# Altium PCB 00.Main.PcbDoc (part 4 of 5)
Units mm, origin at the board's own origin, x right, y up, seen from the top; angles counter-clockwise.
Board outline 300 x 165 mm, 2 copper layers (Top Layer, Bottom Layer); 76 components, 103 nets, 576 pads, 97 vias.
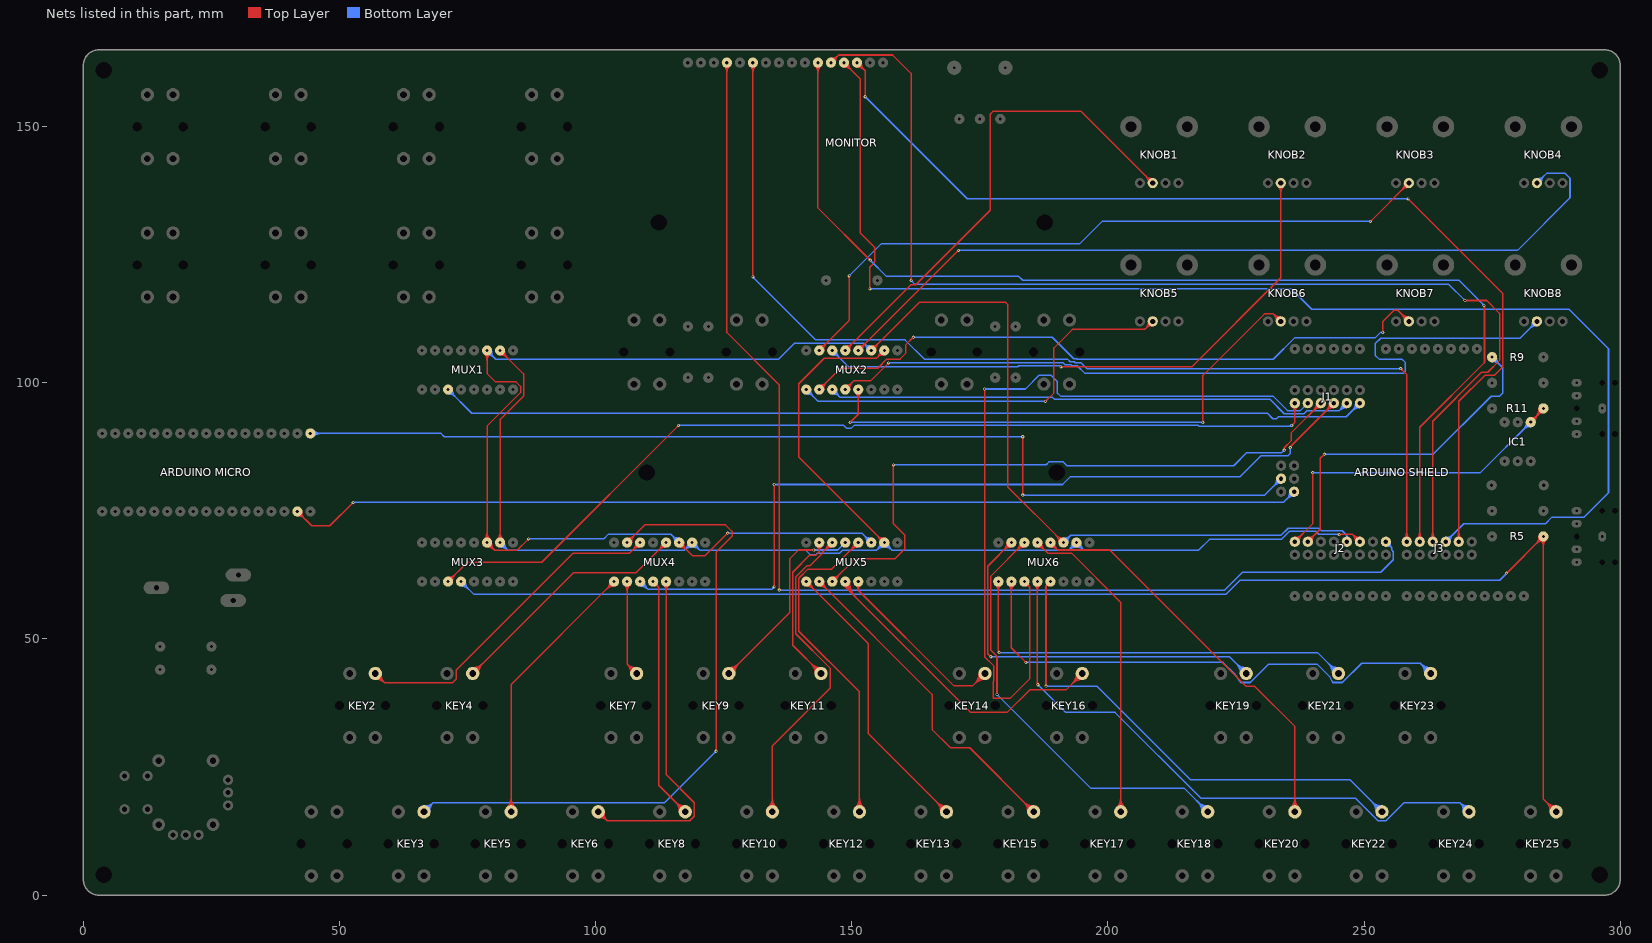
[diagram p4: the nets of this part, all layers, seen from the top]

## Via types
v1: diameter 0.6, hole 0.3, Top Layer to Bottom Layer, 97 vias

## Nets (pads, with @x,y where several pads share a name; then routed paths per layer and width w, separated by ;. In a path a pad name is that pad's centre, name@x,y a point inside that pad or via, vN(x,y) a via of type N, cw(c..) or ccw(c..) an arc to the next point about the centre after c; other vN are vias at no path point) (continued)
KEY2: KEY2.2 MUX4.14 | length 76.5
  Top Layer w0.3: KEY2.2@57,43.25 58.76,41.49 ; KEY2.2@57.068,42.403 cw(c57.193,40.841) 58.301,41.949 cw(c59.409,43.057) KEY2.2@57.847,43.182 ; KEY2.2@57.092,42.104 cw(c57.262,39.991) 58.76,41.49 ; KEY2.2@58.146,43.158 ccw(c60.259,42.988) 58.76,41.49 ; MUX4.14@107.84,68.81 cw(c105.788,68.81) 107.239,67.359 cw(c108.69,65.908) MUX4.14@108.69,67.96 ; MUX4.14@108.14,68.81 cw(c106.812,68.81) 107.751,67.871 cw(c108.69,66.932) MUX4.14@108.69,68.26 ; MUX4.14@108.69,68.81 106.592,66.712 95.566,66.712 72.757,43.903 72.757,42.15 72.096,41.49 58.76,41.49
KEY3: KEY3.2 MUX4.15 | length 141.4
  Top Layer w0.3: MUX4.15@106.15,68.81 109.589,72.249 125.36,72.249 126.63,70.979 126.63,70.065 123.506,66.94 v1(123.506,28.078) ; MUX4.15@106.15,69.36 ccw(c106.15,70.688) 107.089,69.749 ccw(c108.028,68.81) MUX4.15@106.7,68.81 ; MUX4.15@106.15,69.66 ccw(c106.15,71.712) 107.601,70.261 ccw(c109.052,68.81) MUX4.15@107,68.81 ; v1@123.4,28.184 ccw(c123.144,28.441) 123.506,28.441 ccw(c123.868,28.441) v1@123.612,28.184
  Bottom Layer w0.3: KEY3.2@66.5,16.25 68.27,18.02 ; KEY3.2@66.565,17.098 ccw(c66.685,18.681) 67.808,17.558 ccw(c68.931,16.435) KEY3.2@67.348,16.315 ; KEY3.2@66.587,17.397 ccw(c66.75,19.539) 68.27,18.02 ; KEY3.2@67.647,16.337 cw(c69.789,16.5) 68.27,18.02 ; v1@123.356,28.078 cw(c122.994,28.078) 123.25,27.822 cw(c123.506,27.566) v1@123.506,27.928 ; v1(123.506,28.078) 113.447,18.02 68.27,18.02
KEY4: KEY4.2 MUX4.12 | length 63.3
  Top Layer w0.3: KEY4.2@76,43.25 95.626,62.876 107.836,62.876 MUX4.12@113.77,68.81 ; KEY4.2@76,43.8 ccw(c76,45.128) 76.939,44.189 ccw(c77.878,43.25) KEY4.2@76.55,43.25 ; KEY4.2@76,44.1 ccw(c76,46.152) 77.451,44.701 ccw(c78.902,43.25) KEY4.2@76.85,43.25 ; KEY4.2@76,44.4 ccw(c76,47.176) 77.963,45.213 ccw(c79.926,43.25) KEY4.2@77.15,43.25 ; MUX4.12@112.92,68.81 cw(c110.868,68.81) 112.319,67.359 cw(c113.77,65.908) MUX4.12@113.77,67.96 ; MUX4.12@113.22,68.81 cw(c111.892,68.81) 112.831,67.871 cw(c113.77,66.932) MUX4.12@113.77,68.26
KEY5: KEY5.2 MUX4.1 | length 68.2
  Top Layer w0.3: KEY5.2@82.687,17.063 ccw(c80.724,19.026) 83.5,19.026 ccw(c86.276,19.026) KEY5.2@84.313,17.063 ; KEY5.2@82.899,16.851 ccw(c81.448,18.302) 83.5,18.302 ccw(c85.552,18.302) KEY5.2@84.101,16.851 ; KEY5.2@83.111,16.639 ccw(c82.172,17.578) 83.5,17.578 ccw(c84.828,17.578) KEY5.2@83.889,16.639 ; KEY5.2@83.5,16.25 83.5,41.08 MUX4.1@103.61,61.19 ; MUX4.1@102.76,61.19 cw(c100.708,61.19) 102.159,59.739 cw(c103.61,58.288) MUX4.1@103.61,60.34 ; MUX4.1@103.06,61.19 cw(c101.732,61.19) 102.671,60.251 cw(c103.61,59.312) MUX4.1@103.61,60.64
KEY6: KEY6.2 MUX4.5 | length 79.6
  Top Layer w0.3: KEY6.2@100.5,16.25 102.261,14.489 118.375,14.489 119.264,15.378 119.264,18.02 113.77,23.514 MUX4.5@113.77,61.19 ; KEY6.2@100.568,15.403 cw(c100.693,13.841) 101.801,14.949 cw(c102.909,16.057) KEY6.2@101.347,16.182 ; KEY6.2@100.592,15.104 cw(c100.761,12.99) 102.261,14.489 cw(c103.76,15.989) KEY6.2@101.646,16.158 ; MUX4.5@113.169,60.589 cw(c111.718,59.138) 113.77,59.138 cw(c115.822,59.138) MUX4.5@114.371,60.589 ; MUX4.5@113.381,60.801 cw(c112.442,59.862) 113.77,59.862 cw(c115.098,59.862) MUX4.5@114.159,60.801
KEY7: KEY7.2 MUX4.2 | length 30.9
  Top Layer w0.3: MUX4.2@105.549,60.589 cw(c104.098,59.138) 106.15,59.138 cw(c108.202,59.138) MUX4.2@106.751,60.589 ; MUX4.2@105.761,60.801 cw(c104.822,59.862) 106.15,59.862 cw(c107.478,59.862) MUX4.2@106.539,60.801 ; MUX4.2@106.15,61.19 106.15,45.1 ; KEY7.2@106.851,43.299 ccw(c104.453,43.402) 106.15,45.1 ; KEY7.2@107.151,43.286 ccw(c105.378,43.363) 106.633,44.617 ccw(c107.887,45.872) KEY7.2@107.964,44.099 ; KEY7.2@107.951,44.399 cw(c107.848,46.797) 106.15,45.1 ; KEY7.2@108,43.25 106.15,45.1
KEY8: KEY8.2 MUX4.4 | length 59.1
  Top Layer w0.3: MUX4.4@111.23,61.19 112.304,60.116 ; MUX4.4@111.428,60.363 cw(c111.645,59.456) 112.304,60.116 ; MUX4.4@112.057,60.992 ccw(c112.964,60.775) 112.304,60.116 ; KEY8.2@116.35,16.25 ccw(c113.574,16.25) 115.537,18.213 ccw(c117.5,20.176) KEY8.2@117.5,17.4 ; KEY8.2@116.65,16.25 ccw(c114.598,16.25) 116.049,17.701 ccw(c117.5,19.152) KEY8.2@117.5,17.1 ; KEY8.2@116.95,16.25 ccw(c115.622,16.25) 116.561,17.189 ccw(c117.5,18.128) KEY8.2@117.5,16.8 ; KEY8.2@117.5,16.25 112.304,21.446 112.304,60.116
KEY9: KEY9.2 MUX5.13 | length 50.3
  Top Layer w0.3: KEY9.2@126,43.25 137.86,55.11 137.86,65.597 139.623,67.36 v1(142.597,67.36) ; KEY9.2@126,43.8 ccw(c126,45.128) 126.939,44.189 ccw(c127.878,43.25) KEY9.2@126.55,43.25 ; KEY9.2@126,44.1 ccw(c126,46.152) 127.451,44.701 ccw(c128.902,43.25) KEY9.2@126.85,43.25 ; KEY9.2@126,44.4 ccw(c126,47.176) 127.963,45.213 ccw(c129.926,43.25) KEY9.2@127.15,43.25 ; v1@142.491,67.254 ccw(c142.235,66.998) 142.235,67.36 ccw(c142.235,67.722) v1@142.491,67.466
  Bottom Layer w0.3: v1(142.597,67.36) 147.28,67.36 MUX5.13@148.73,68.81 ; v1@142.703,67.254 cw(c142.959,66.998) 142.959,67.36 cw(c142.959,67.722) v1@142.703,67.466
KEY10: KEY10.2 MUX5.14 | length 78.3
  Top Layer w0.3: KEY10.2@133.687,17.063 ccw(c131.724,19.026) 134.5,19.026 ccw(c137.276,19.026) KEY10.2@135.313,17.063 ; KEY10.2@133.899,16.851 ccw(c132.448,18.302) 134.5,18.302 ccw(c136.552,18.302) KEY10.2@135.101,16.851 ; KEY10.2@134.111,16.639 ccw(c133.172,17.578) 134.5,17.578 ccw(c135.828,17.578) KEY10.2@134.889,16.639 ; KEY10.2@134.5,16.25 134.5,29.116 145.756,40.372 145.756,44.309 139.06,51.005 139.06,62.084 141.224,64.248 141.819,64.248 144.25,66.679 144.25,66.87 MUX5.14@146.19,68.81 ; MUX5.14@145.34,68.81 cw(c143.288,68.81) 144.739,67.359 cw(c146.19,65.908) MUX5.14@146.19,67.96 ; MUX5.14@145.64,68.81 cw(c144.312,68.81) 145.251,67.871 cw(c146.19,66.932) MUX5.14@146.19,68.26
KEY11: KEY11.2 MUX5.15 | length 44.7
  Top Layer w0.3: KEY11.2@142.85,43.25 ccw(c140.074,43.25) 142.037,45.213 ccw(c144,47.176) KEY11.2@144,44.4 ; MUX5.15@143.112,68.152 cw(c142.183,67.017) 143.65,67.017 ; KEY11.2@143.15,43.25 ccw(c141.098,43.25) 142.549,44.701 ccw(c144,46.152) KEY11.2@144,44.1 ; MUX5.15@143.302,68.384 cw(c142.701,67.65) 143.65,67.65 cw(c144.599,67.65) MUX5.15@143.998,68.384 ; KEY11.2@143.45,43.25 ccw(c142.122,43.25) 143.061,44.189 ccw(c144,45.128) KEY11.2@144,43.8 ; MUX5.15@143.65,68.81 143.65,67.017 ; KEY11.2@144,43.25 138.46,48.79 138.46,63.035 141.797,66.372 143.005,66.372 143.65,67.017 ; MUX5.15@144.188,68.152 ccw(c145.117,67.017) 143.65,67.017
KEY12: KEY12.2 MUX5.12 | length 80
  Top Layer w0.3: MUX5.12@150.42,68.81 cw(c148.368,68.81) 149.819,67.359 cw(c151.27,65.908) MUX5.12@151.27,67.96 ; KEY12.2@150.687,17.063 ccw(c148.724,19.026) 151.5,19.026 ccw(c154.276,19.026) KEY12.2@152.313,17.063 ; MUX5.12@150.72,68.81 cw(c149.392,68.81) 150.331,67.871 cw(c151.27,66.932) MUX5.12@151.27,68.26 ; KEY12.2@150.899,16.851 ccw(c149.448,18.302) 151.5,18.302 ccw(c153.552,18.302) KEY12.2@152.101,16.851 ; KEY12.2@151.111,16.639 ccw(c150.172,17.578) 151.5,17.578 ccw(c152.828,17.578) KEY12.2@151.889,16.639 ; MUX5.12@151.27,68.81 146.101,63.641 141.466,63.641 139.66,61.835 139.66,51.523 151.5,39.683 KEY12.2@151.5,16.25
KEY13: KEY13.2 MUX5.1 | length 71.3
  Top Layer w0.3: MUX5.1@141.11,60.34 cw(c141.11,58.288) 142.561,59.739 cw(c144.012,61.19) MUX5.1@141.96,61.19 ; MUX5.1@141.11,60.64 cw(c141.11,59.312) 142.049,60.251 cw(c142.988,61.19) MUX5.1@141.66,61.19 ; MUX5.1@141.11,61.19 153.249,49.051 153.249,31.501 KEY13.2@168.5,16.25 ; KEY13.2@167.35,16.25 ccw(c164.574,16.25) 166.537,18.213 ccw(c168.5,20.176) KEY13.2@168.5,17.4 ; KEY13.2@167.65,16.25 ccw(c165.598,16.25) 167.049,17.701 ccw(c168.5,19.152) KEY13.2@168.5,17.1 ; KEY13.2@167.95,16.25 ccw(c166.622,16.25) 167.561,17.189 ccw(c168.5,18.128) KEY13.2@168.5,16.8
KEY14: KEY14.2 MUX5.5 | length 48.7
  Top Layer w0.3: MUX5.5@150.762,60.508 cw(c150.008,59.496) 151.27,59.496 cw(c152.532,59.496) MUX5.5@151.778,60.508 ; MUX5.5@150.941,60.749 cw(c150.453,60.094) 151.27,60.094 cw(c152.087,60.094) MUX5.5@151.599,60.749 ; MUX5.5@151.27,61.19 151.27,59.496 169.937,40.829 173.579,40.829 KEY14.2@176,43.25 ; KEY14.2@174.85,43.25 cw(c172.074,43.25) 174.037,41.287 cw(c176,39.324) KEY14.2@176,42.1 ; KEY14.2@175.15,43.25 cw(c173.098,43.25) 174.549,41.799 cw(c176,40.348) KEY14.2@176,42.4 ; KEY14.2@175.45,43.25 cw(c174.122,43.25) 175.061,42.311 cw(c176,41.372) KEY14.2@176,42.7
KEY15: KEY15.2 MUX5.2 | length 79.4
  Top Layer w0.3: MUX5.2@143.65,60.34 cw(c143.65,58.288) 145.101,59.739 cw(c146.552,61.19) MUX5.2@144.5,61.19 ; MUX5.2@143.65,60.64 cw(c143.65,59.312) 144.589,60.251 cw(c145.528,61.19) MUX5.2@144.2,61.19 ; MUX5.2@143.65,61.19 165.67,39.17 165.67,32.346 169.277,28.739 173.011,28.739 KEY15.2@185.5,16.25 ; KEY15.2@184.35,16.25 ccw(c181.574,16.25) 183.537,18.213 ccw(c185.5,20.176) KEY15.2@185.5,17.4 ; KEY15.2@184.65,16.25 ccw(c182.598,16.25) 184.049,17.701 ccw(c185.5,19.152) KEY15.2@185.5,17.1 ; KEY15.2@184.95,16.25 ccw(c183.622,16.25) 184.561,17.189 ccw(c185.5,18.128) KEY15.2@185.5,16.8
KEY16: KEY16.2 MUX5.4 | length 83
  Top Layer w0.3: MUX5.4@148.38,61.19 ccw(c150.03,61.19) 148.863,60.023 ; MUX5.4@148.566,60.356 cw(c148.527,60.157) 148.73,60.157 ; MUX5.4@148.68,61.19 ccw(c151.054,61.19) 149.375,59.511 ; MUX5.4@148.73,61.19 148.73,60.157 ; MUX5.4@148.894,60.356 ccw(c148.933,60.157) 148.73,60.157 ; MUX5.4@148.98,61.19 ccw(c152.078,61.19) 149.887,58.999 ; MUX5.4@149.28,61.19 ccw(c153.103,61.19) 150.4,58.487 ; MUX5.4@149.58,61.19 ccw(c154.127,61.19) 150.912,57.975 ; KEY16.2@193.85,43.25 cw(c191.074,43.25) 193.037,41.287 cw(c195,39.324) KEY16.2@195,42.1 ; KEY16.2@194.15,43.25 cw(c192.098,43.25) 193.549,41.799 cw(c195,40.348) KEY16.2@195,42.4 ; KEY16.2@194.45,43.25 cw(c193.122,43.25) 194.061,42.311 cw(c195,41.372) KEY16.2@195,42.7 ; KEY16.2@195,43.25 191.804,40.054 184.736,40.054 180.329,35.648 173.239,35.648 148.73,60.157
KEY17: KEY17.2 MUX6.13 | length 77
  Top Layer w0.3: MUX6.13@186.23,67.96 cw(c186.23,65.908) 187.681,67.359 cw(c189.132,68.81) MUX6.13@187.08,68.81 ; MUX6.13@186.23,68.26 cw(c186.23,66.932) 187.169,67.871 cw(c188.108,68.81) MUX6.13@186.78,68.81 ; MUX6.13@186.23,68.81 188.28,66.76 192.876,66.76 202.5,57.136 KEY17.2@202.5,16.25 ; KEY17.2@201.687,17.063 ccw(c199.724,19.026) 202.5,19.026 ccw(c205.276,19.026) KEY17.2@203.313,17.063 ; KEY17.2@201.899,16.851 ccw(c200.448,18.302) 202.5,18.302 ccw(c204.552,18.302) KEY17.2@203.101,16.851 ; KEY17.2@202.111,16.639 ccw(c201.172,17.578) 202.5,17.578 ccw(c203.828,17.578) KEY17.2@202.889,16.639
KEY18: KEY18.2 MUX6.14 | length 99.6
  Top Layer w0.3: v1@178.244,39.259 ccw(c177.988,39.515) 178.35,39.515 ccw(c178.712,39.515) v1@178.456,39.259 ; v1(178.35,39.153) 178.35,46.615 177.16,47.805 177.16,62.28 MUX6.14@183.69,68.81 ; MUX6.14@182.84,68.81 cw(c180.788,68.81) 182.239,67.359 cw(c183.69,65.908) MUX6.14@183.69,67.96 ; MUX6.14@183.14,68.81 cw(c181.812,68.81) 182.751,67.871 cw(c183.69,66.932) MUX6.14@183.69,68.26
  Bottom Layer w0.3: v1@178.35,39.003 cw(c178.35,38.641) 178.606,38.897 cw(c178.862,39.153) v1@178.5,39.153 ; v1(178.35,39.153) 196.689,20.814 214.936,20.814 KEY18.2@219.5,16.25 ; KEY18.2@218.35,16.25 ccw(c215.574,16.25) 217.537,18.213 ccw(c219.5,20.176) KEY18.2@219.5,17.4 ; KEY18.2@218.65,16.25 ccw(c216.598,16.25) 218.049,17.701 ccw(c219.5,19.152) KEY18.2@219.5,17.1 ; KEY18.2@218.95,16.25 ccw(c217.622,16.25) 218.561,17.189 ccw(c219.5,18.128) KEY18.2@219.5,16.8
KEY19: KEY19.2 MUX6.15 | length 91.8
  Top Layer w0.3: v1@177.001,46.519 ccw(c176.638,46.519) 176.895,46.775 ccw(c177.151,47.031) v1@177.151,46.669 ; v1(177.151,46.519) 176.541,47.128 176.541,64.201 MUX6.15@181.15,68.81 ; MUX6.15@180.3,68.81 cw(c178.248,68.81) 179.699,67.359 cw(c181.15,65.908) MUX6.15@181.15,67.96 ; MUX6.15@180.6,68.81 cw(c179.272,68.81) 180.211,67.871 cw(c181.15,66.932) MUX6.15@181.15,68.26
  Bottom Layer w0.3: v1(177.151,46.519) 223.731,46.519 KEY19.2@227,43.25 ; v1@177.257,46.413 cw(c177.513,46.157) 177.513,46.519 cw(c177.513,46.881) v1@177.257,46.625 ; KEY19.2@225.85,43.25 ccw(c223.074,43.25) 225.037,45.213 ccw(c227,47.176) KEY19.2@227,44.4 ; KEY19.2@226.15,43.25 ccw(c224.098,43.25) 225.549,44.701 ccw(c227,46.152) KEY19.2@227,44.1 ; KEY19.2@226.45,43.25 ccw(c225.122,43.25) 226.061,44.189 ccw(c227,45.128) KEY19.2@227,43.8
KEY20: KEY20.2 MUX6.12 | length 94.2
  Top Layer w0.3: MUX6.12@188.77,67.96 cw(c188.771,65.912) 190.22,67.36 ; MUX6.12@188.77,68.26 cw(c188.771,66.935) 189.708,67.872 cw(c190.645,68.809) MUX6.12@189.32,68.81 ; MUX6.12@188.77,68.81 190.22,67.36 ; MUX6.12@189.62,68.81 ccw(c191.668,68.808) 190.22,67.36 ; KEY20.2@235.687,17.063 ccw(c233.724,19.026) 236.5,19.026 ccw(c239.276,19.026) KEY20.2@237.313,17.063 ; KEY20.2@235.899,16.851 ccw(c234.448,18.302) 236.5,18.302 ccw(c238.552,18.302) KEY20.2@237.101,16.851 ; KEY20.2@236.111,16.639 ccw(c235.172,17.578) 236.5,17.578 ccw(c237.828,17.578) KEY20.2@236.889,16.639 ; KEY20.2@236.5,16.25 236.5,32.915 228.687,40.728 226.997,40.728 200.365,67.36 190.22,67.36
KEY21: KEY21.2 MUX6.1 | length 98.1
  Top Layer w0.3: MUX6.1@178.009,60.589 cw(c176.558,59.138) 178.61,59.138 cw(c180.662,59.138) MUX6.1@179.211,60.589 ; MUX6.1@178.221,60.801 cw(c177.282,59.862) 178.61,59.862 cw(c179.938,59.862) MUX6.1@178.999,60.801 ; 178.61,48.034 ccw(c179.453,48.034) v1@178.857,47.438 ; MUX6.1@178.61,61.19 178.61,47.472 v1(178.751,47.332)
  Bottom Layer w0.3: v1(178.751,47.332) 240.918,47.332 KEY21.2@245,43.25 ; v1@178.857,47.226 cw(c179.113,46.969) 179.113,47.332 cw(c179.113,47.694) v1@178.857,47.438 ; KEY21.2@243.85,43.25 ccw(c241.074,43.25) 243.037,45.213 ccw(c245,47.176) KEY21.2@245,44.4 ; KEY21.2@244.15,43.25 ccw(c242.098,43.25) 243.549,44.701 ccw(c245,46.152) KEY21.2@245,44.1 ; KEY21.2@244.45,43.25 ccw(c243.122,43.25) 244.061,44.189 ccw(c245,45.128) KEY21.2@245,43.8
KEY22: KEY22.2 MUX6.5 | length 108.3
  Top Layer w0.3: v1@187.814,40.91 ccw(c187.558,41.166) 187.92,41.166 ccw(c188.282,41.166) v1@188.026,40.91 ; v1(187.92,40.804) 187.92,60.34 ; MUX6.5@188.003,60.823 cw(c187.62,60.64) 187.92,60.34 ; MUX6.5@188.403,60.423 ccw(c188.22,60.04) 187.92,60.34 ; MUX6.5@188.77,61.19 187.92,60.34
  Bottom Layer w0.3: v1(187.92,40.804) 197.826,40.804 216.114,22.516 247.234,22.516 KEY22.2@253.5,16.25 ; v1@188.026,40.698 cw(c188.282,40.442) 188.282,40.804 cw(c188.282,41.166) v1@188.026,40.91 ; KEY22.2@252.35,16.25 ccw(c249.574,16.25) 251.537,18.213 ccw(c253.5,20.176) KEY22.2@253.5,17.4 ; KEY22.2@252.65,16.25 ccw(c250.598,16.25) 252.049,17.701 ccw(c253.5,19.152) KEY22.2@253.5,17.1 ; KEY22.2@252.95,16.25 ccw(c251.622,16.25) 252.561,17.189 ccw(c253.5,18.128) KEY22.2@253.5,16.8
KEY23: KEY23.2 MUX6.2 | length 119.4
  Top Layer w0.3: MUX6.2@180.549,60.589 cw(c179.098,59.138) 181.15,59.138 cw(c183.202,59.138) MUX6.2@181.751,60.589 ; MUX6.2@180.761,60.801 cw(c179.822,59.862) 181.15,59.862 cw(c182.478,59.862) MUX6.2@181.539,60.801 ; MUX6.2@181.15,61.19 181.15,48.285 v1(184.009,45.427) ; v1@183.859,45.427 ccw(c183.496,45.427) 183.753,45.683 ccw(c184.009,45.939) v1@184.009,45.577
  Bottom Layer w0.3: v1(184.009,45.427) 222.49,45.427 224.676,43.24 225.908,41.5 227.783,41.5 231.303,45.02 240.905,45.02 243.267,42.658 243.917,41.5 245.766,41.5 249.541,45.274 260.976,45.274 KEY23.2@263,43.25 ; v1@184.115,45.321 cw(c184.371,45.064) 184.371,45.427 cw(c184.371,45.789) v1@184.115,45.533 ; KEY23.2@261.85,43.25 ccw(c259.074,43.25) 261.037,45.213 ccw(c263,47.176) KEY23.2@263,44.4 ; KEY23.2@262.15,43.25 ccw(c260.098,43.25) 261.549,44.701 ccw(c263,46.152) KEY23.2@263,44.1 ; KEY23.2@262.45,43.25 ccw(c261.122,43.25) 262.061,44.189 ccw(c263,45.128) KEY23.2@263,43.8
KEY24: KEY24.2 MUX6.4 | length 130.4
  Top Layer w0.3: MUX6.4@185.629,60.589 cw(c184.178,59.138) 186.23,59.138 cw(c188.282,59.138) MUX6.4@186.831,60.589 ; MUX6.4@185.841,60.801 cw(c184.902,59.862) 186.23,59.862 cw(c187.558,59.862) MUX6.4@186.619,60.801 ; 186.23,41.699 ccw(c186.986,41.699) v1@186.451,41.164 ; MUX6.4@186.23,61.19 186.23,41.173 v1(186.345,41.058)
  Bottom Layer w0.3: v1@186.345,40.908 cw(c186.345,40.546) 186.601,40.802 cw(c186.858,41.058) v1@186.495,41.058 ; v1(186.345,41.058) 191.756,35.648 201.408,35.648 218.121,18.934 248.296,18.934 252.73,14.5 254.301,14.5 257.821,18.02 268.73,18.02 ; KEY24.2@269.353,16.337 ccw(c267.211,16.5) 268.73,18.02 ; KEY24.2@269.652,16.315 ccw(c268.069,16.435) 269.192,17.558 ccw(c270.315,18.681) KEY24.2@270.435,17.098 ; KEY24.2@270.413,17.397 cw(c270.25,19.539) 268.73,18.02 ; KEY24.2@270.5,16.25 268.73,18.02
KEY25: KEY25.2 MUX3.4 R5.2 | length 298.5
  Top Layer w0.3: v1(277.844,62.844) R5.2@285,70 285,18.75 KEY25.2@287.5,16.25 ; v1@277.844,62.994 ccw(c277.844,63.356) 278.1,63.1 ccw(c278.356,62.844) v1@277.994,62.844 ; 284.061,69.061 ccw(c283.122,70) R5.2@284.45,70 ; 284.061,69.061 cw(c285,68.122) R5.2@285,69.45 ; R5.2@284.15,70 cw(c282.098,70) 283.549,68.549 cw(c285,67.098) R5.2@285,69.15 ; R5.2@284.399,69.399 cw(c282.948,67.948) 285,67.948 cw(c287.052,67.948) R5.2@285.601,69.399 ; R5.2@284.611,69.611 cw(c283.672,68.672) 285,68.672 cw(c286.328,68.672) R5.2@285.389,69.611 ; KEY25.2@286.35,16.25 ccw(c283.574,16.25) 285.537,18.213 ccw(c287.5,20.176) KEY25.2@287.5,17.4 ; KEY25.2@286.65,16.25 ccw(c284.598,16.25) 286.049,17.701 ccw(c287.5,19.152) KEY25.2@287.5,17.1 ; KEY25.2@286.95,16.25 ccw(c285.622,16.25) 286.561,17.189 ccw(c287.5,18.128) KEY25.2@287.5,16.8
  Bottom Layer w0.3: MUX3.4@73.73,60.34 cw(c73.73,58.288) 75.181,59.739 cw(c76.632,61.19) MUX3.4@74.58,61.19 ; MUX3.4@73.73,60.64 cw(c73.73,59.312) 74.669,60.251 cw(c75.608,61.19) MUX3.4@74.28,61.19 ; MUX3.4@73.73,61.19 76.235,58.685 222.998,58.685 225.792,61.479 276.479,61.479 v1(277.844,62.844) ; v1@277.694,62.844 cw(c277.331,62.844) 277.588,62.588 cw(c277.844,62.331) v1@277.844,62.694
KNOB1: KNOB1.2 MUX2.13 | length 106.7
  Top Layer w0.3: MUX2.13@148.73,106.31 161.558,119.138 162.469,119.138 177.024,133.693 177.024,152.437 177.557,152.97 194.78,152.97 KNOB1.2@208.75,139 ; MUX2.13@148.73,106.86 ccw(c148.73,108.188) 149.669,107.249 ccw(c150.608,106.31) MUX2.13@149.28,106.31 ; MUX2.13@148.73,107.16 ccw(c148.73,109.212) 150.181,107.761 ccw(c151.632,106.31) MUX2.13@149.58,106.31 ; KNOB1.2@207.9,139 ccw(c205.848,139) 207.299,140.451 ccw(c208.75,141.902) KNOB1.2@208.75,139.85 ; KNOB1.2@208.2,139 ccw(c206.872,139) 207.811,139.939 ccw(c208.75,140.878) KNOB1.2@208.75,139.55
KNOB2: KNOB2.2 MUX2.14 | length 125.9
  Top Layer w0.3: v1(190.828,103.11) 216.368,103.11 233.75,120.492 KNOB2.2@233.75,139 ; v1@190.934,103.004 cw(c191.19,102.748) 191.19,103.11 cw(c191.19,103.472) v1@190.934,103.216 ; KNOB2.2@233.149,138.399 cw(c231.698,136.948) 233.75,136.948 cw(c235.802,136.948) KNOB2.2@234.351,138.399 ; KNOB2.2@233.361,138.611 cw(c232.422,137.672) 233.75,137.672 cw(c235.078,137.672) KNOB2.2@234.139,138.611
  Bottom Layer w0.3: MUX2.14@146.19,105.46 cw(c146.19,103.408) 147.641,104.859 cw(c149.092,106.31) MUX2.14@147.04,106.31 ; MUX2.14@146.19,105.76 cw(c146.19,104.432) 147.129,105.371 cw(c148.068,106.31) MUX2.14@146.74,106.31 ; MUX2.14@146.19,106.31 149.391,103.109 182.383,103.109 182.584,103.31 190.628,103.31 v1(190.828,103.11)
KNOB3: KNOB3.2 MUX2.15 | length 146.7
  Top Layer w0.3: MUX2.15@143.65,106.31 149.465,112.125 v1(149.465,120.865) ; MUX2.15@143.65,106.86 ccw(c143.65,108.188) 144.589,107.249 ccw(c145.528,106.31) MUX2.15@144.2,106.31 ; MUX2.15@143.65,107.16 ccw(c143.65,109.212) 145.101,107.761 ccw(c146.552,106.31) MUX2.15@144.5,106.31 ; v1@149.359,120.759 cw(c149.102,120.502) 149.465,120.502 cw(c149.827,120.502) v1@149.571,120.759 ; v1(251.257,131.507) KNOB3.2@258.75,139 ; v1@251.257,131.657 ccw(c251.257,132.019) 251.513,131.763 ccw(c251.769,131.507) v1@251.407,131.507 ; KNOB3.2@257.9,139 cw(c255.848,139) 257.299,137.549 cw(c258.75,136.098) KNOB3.2@258.75,138.15 ; KNOB3.2@258.2,139 cw(c256.872,139) 257.811,138.061 cw(c258.75,137.122) KNOB3.2@258.75,138.45
  Bottom Layer w0.3: v1(149.465,120.865) 155.789,127.189 194.55,127.189 198.868,131.507 v1(251.257,131.507) ; v1@149.465,121.015 ccw(c149.465,121.377) 149.721,121.121 ccw(c149.977,120.865) v1@149.615,120.865 ; v1@251.151,131.401 ccw(c250.895,131.145) 250.895,131.507 ccw(c250.895,131.869) v1@251.151,131.613
KNOB4: KNOB4.2 MUX2.12 | length 174.5
  Top Layer w0.3: MUX2.12@151.27,106.31 v1(170.803,125.843) ; MUX2.12@151.27,106.86 ccw(c151.27,108.188) 152.209,107.249 ccw(c153.148,106.31) MUX2.12@151.82,106.31 ; MUX2.12@151.27,107.16 ccw(c151.27,109.212) 152.721,107.761 ccw(c154.172,106.31) MUX2.12@152.12,106.31 ; v1@170.653,125.843 cw(c170.291,125.843) 170.547,125.587 cw(c170.803,125.331) v1@170.803,125.693
  Bottom Layer w0.3: v1(170.803,125.843) 279.944,125.843 290.206,136.105 290.206,139.94 289.266,140.88 285.63,140.88 KNOB4.2@283.75,139 ; v1@170.909,125.737 cw(c171.165,125.481) 171.165,125.843 cw(c171.165,126.205) v1@170.909,125.949 ; KNOB4.2@283.75,139.55 ccw(c283.75,140.878) 284.689,139.939 ccw(c285.628,139) KNOB4.2@284.3,139 ; KNOB4.2@283.75,139.85 ccw(c283.75,141.902) 285.201,140.451 ccw(c286.652,139) KNOB4.2@284.6,139
KNOB5: KNOB5.2 MUX2.1 | length 92
  Top Layer w0.3: v1(187.819,96.379) 189.47,98.03 189.47,106.818 193.076,110.425 207.175,110.425 KNOB5.2@208.75,112 ; v1@187.819,96.529 ccw(c187.819,96.891) 188.075,96.635 ccw(c188.331,96.379) v1@187.969,96.379 ; KNOB5.2@207.9,112 cw(c205.848,112) 207.299,110.549 cw(c208.75,109.098) KNOB5.2@208.75,111.15 ; KNOB5.2@208.2,112 cw(c206.872,112) 207.811,111.061 cw(c208.75,110.122) KNOB5.2@208.75,111.45
  Bottom Layer w0.3: MUX2.1@141.11,97.84 cw(c141.11,95.788) 142.561,97.239 cw(c144.012,98.69) MUX2.1@141.96,98.69 ; MUX2.1@141.11,98.14 cw(c141.11,96.812) 142.049,97.751 cw(c142.988,98.69) MUX2.1@141.66,98.69 ; MUX2.1@141.11,98.69 143.421,96.379 v1(187.819,96.379) ; v1@187.713,96.273 ccw(c187.456,96.017) 187.456,96.379 ccw(c187.456,96.741) v1@187.713,96.485
KNOB6: KNOB6.2 MUX2.5 | length 118.7
  Top Layer w0.3: v1(149.693,92.29) 151.27,93.866 MUX2.5@151.27,98.69 ; v1@149.693,92.44 ccw(c149.693,92.802) 149.949,92.546 ccw(c150.205,92.29) v1@149.843,92.29 ; MUX2.5@150.669,98.089 cw(c149.218,96.638) 151.27,96.638 cw(c153.322,96.638) MUX2.5@151.871,98.089 ; MUX2.5@150.881,98.301 cw(c149.942,97.362) 151.27,97.362 cw(c152.598,97.362) MUX2.5@151.659,98.301 ; v1@218.447,92.396 ccw(c218.19,92.652) 218.553,92.652 ccw(c218.915,92.652) v1@218.659,92.396 ; v1(218.553,92.29) 218.553,101.434 230.569,113.45 232.3,113.45 ; KNOB6.2@232.9,112 ccw(c230.852,112.002) 232.3,113.45 ; KNOB6.2@233.2,112 ccw(c231.875,112.001) 232.812,112.938 ccw(c233.749,113.875) KNOB6.2@233.75,112.55 ; KNOB6.2@233.75,112 232.3,113.45 ; KNOB6.2@233.75,112.85 cw(c233.749,114.898) 232.3,113.45
  Bottom Layer w0.3: v1(149.693,92.29) v1(218.553,92.29) ; v1@149.799,92.184 cw(c150.055,91.927) 150.055,92.29 cw(c150.055,92.652) v1@149.799,92.396 ; v1@218.447,92.184 ccw(c218.19,91.927) 218.19,92.29 ccw(c218.19,92.652) v1@218.447,92.396
KNOB7: KNOB7.2 MUX2.2 | length 141.1
  Top Layer w0.3: MUX2.2@143.65,98.69 147.816,102.856 155.053,102.856 156.831,104.634 159.421,104.634 160.514,105.726 160.514,107.403 v1(162.012,108.901) ; MUX2.2@143.65,99.24 ccw(c143.65,100.568) 144.589,99.629 ccw(c145.528,98.69) MUX2.2@144.2,98.69 ; MUX2.2@143.65,99.54 ccw(c143.65,101.592) 145.101,100.141 ccw(c146.552,98.69) MUX2.2@144.5,98.69 ; v1@161.862,108.901 cw(c161.5,108.901) 161.756,108.645 cw(c162.012,108.389) v1@162.012,108.751 ; v1@253.575,109.937 ccw(c253.319,110.194) 253.681,110.194 ccw(c254.043,110.194) v1@253.787,109.937 ; v1(253.681,109.831) 253.681,112 255.84,114.159 256.591,114.159 KNOB7.2@258.75,112 ; KNOB7.2@257.9,112 ccw(c255.848,112) 257.299,113.451 ccw(c258.75,114.902) KNOB7.2@258.75,112.85 ; KNOB7.2@258.2,112 ccw(c256.872,112) 257.811,112.939 ccw(c258.75,113.878) KNOB7.2@258.75,112.55
  Bottom Layer w0.3: v1(162.012,108.901) 189.123,108.901 193.325,104.7 193.947,104.7 194.038,104.609 232.294,104.609 236.51,108.825 252.22,108.825 253.227,109.831 v1(253.681,109.831) ; v1@162.118,108.795 cw(c162.374,108.539) 162.374,108.901 cw(c162.374,109.263) v1@162.118,109.007 ; v1@253.575,109.725 ccw(c253.319,109.469) 253.319,109.831 ccw(c253.319,110.194) v1@253.575,109.937
KNOB8: KNOB8.2 MUX2.4 | length 167.9
  Top Layer w0.3: MUX2.4@148.73,98.69 150.407,100.367 153.681,100.367 v1(157.186,103.872) ; MUX2.4@148.73,99.24 ccw(c148.73,100.568) 149.669,99.629 ccw(c150.608,98.69) MUX2.4@149.28,98.69 ; MUX2.4@148.73,99.54 ccw(c148.73,101.592) 150.181,100.141 ccw(c151.632,98.69) MUX2.4@149.58,98.69 ; v1@157.036,103.872 cw(c156.674,103.872) 156.93,103.616 cw(c157.186,103.36) v1@157.186,103.722
  Bottom Layer w0.3: v1(157.186,103.872) 157.224,103.91 191.26,103.91 191.67,103.5 192.838,103.5 193.017,103.32 194.034,103.32 195.515,101.84 257.715,101.84 258.075,102.2 258.075,103.954 257.472,104.558 252.995,104.558 252.208,105.345 252.208,107.657 253.249,108.698 280.448,108.698 KNOB8.2@283.75,112 ; v1@157.292,103.766 cw(c157.64,103.419) 157.64,103.91 ; KNOB8.2@282.9,112 cw(c280.848,112) 282.299,110.549 cw(c283.75,109.098) KNOB8.2@283.75,111.15 ; KNOB8.2@283.2,112 cw(c281.872,112) 282.811,111.061 cw(c283.75,110.122) KNOB8.2@283.75,111.45
LCD_D4: J3.4 MONITOR.11 | length 230.6
  Top Layer w0.3: MONITOR.11@142.799,161.899 cw(c141.348,160.448) 143.4,160.448 cw(c145.452,160.448) MONITOR.11@144.001,161.899 ; MONITOR.11@143.011,162.111 cw(c142.072,161.172) 143.4,161.172 cw(c144.728,161.172) MONITOR.11@143.789,162.111 ; MONITOR.11@143.4,162.5 143.4,134.143 v1(153.605,123.938) ; v1@153.455,123.938 ccw(c153.093,123.938) 153.349,124.194 ccw(c153.605,124.45) v1@153.605,124.088 ; J3.4@260.271,69.571 ccw(c258.82,71.022) 260.872,71.022 ccw(c262.924,71.022) J3.4@261.473,69.571 ; J3.4@260.483,69.359 ccw(c259.544,70.298) 260.872,70.298 ccw(c262.2,70.298) J3.4@261.261,69.359 ; J3.4@260.872,68.97 260.872,91.307 273.518,103.953 273.518,115.023 v1(273.417,115.124) ; v1@273.311,115.018 cw(c272.809,114.517) 273.518,114.517
  Bottom Layer w0.3: v1@153.605,123.788 cw(c153.605,123.426) 153.861,123.682 cw(c154.117,123.938) v1@153.755,123.938 ; v1(153.605,123.938) 156.778,120.765 182.61,120.765 183.374,120.001 268.54,120.001 v1(273.417,115.124) ; v1@273.267,115.124 ccw(c272.904,115.124) 273.161,115.38 ccw(c273.417,115.636) v1@273.417,115.274
LCD_D5: J3.6 MONITOR.12 | length 239.3
  Top Layer w0.3: MONITOR.12@145.94,162.5 147.434,163.994 157.974,163.994 161.58,160.387 v1(161.58,120.001) ; MONITOR.12@145.94,163.05 ccw(c145.94,164.378) 146.879,163.439 ccw(c147.818,162.5) MONITOR.12@146.49,162.5 ; MONITOR.12@145.94,163.35 ccw(c145.94,165.402) 147.391,163.951 ccw(c148.842,162.5) MONITOR.12@146.79,162.5 ; v1@161.474,120.107 ccw(c161.218,120.363) 161.58,120.363 ccw(c161.943,120.363) v1@161.686,120.107 ; J3.6@262.811,69.571 ccw(c261.36,71.022) 263.412,71.022 ccw(c265.464,71.022) J3.6@264.013,69.571 ; J3.6@263.023,69.359 ccw(c262.084,70.298) 263.412,70.298 ccw(c264.74,70.298) J3.6@263.801,69.359 ; J3.6@263.412,68.97 263.412,92.512 272.95,102.05 274.15,102.05 276.465,104.365 276.465,113.549 273.95,116.064 v1(269.708,116.064) ; v1@269.814,115.958 cw(c270.07,115.702) 270.07,116.064 cw(c270.07,116.426) v1@269.814,116.17
  Bottom Layer w0.3: v1@161.58,119.851 cw(c161.58,119.489) 161.836,119.745 cw(c162.093,120.001) v1@161.73,120.001 ; v1(161.58,120.001) 162.368,119.214 266.559,119.214 v1(269.708,116.064) ; v1@269.558,116.064 ccw(c269.196,116.064) 269.452,116.32 ccw(c269.708,116.576) v1@269.708,116.214
LCD_D6: J3.8 MONITOR.13 | length 271.7
  Top Layer w0.3: MONITOR.13@148.48,161.65 cw(c148.48,159.598) 149.931,161.049 cw(c151.382,162.5) MONITOR.13@149.33,162.5 ; MONITOR.13@148.48,161.95 cw(c148.48,160.622) 149.419,161.561 ; MONITOR.13@148.48,162.5 151.674,159.306 151.674,129.221 154.519,126.376 154.519,123.557 153.529,122.566 153.529,118.375 v1(153.554,118.35) ; MONITOR.13@149.03,162.5 ccw(c150.358,162.5) 149.419,161.561 ; v1@153.448,118.456 ccw(c153.253,118.651) 153.529,118.651 ; 153.529,118.773 ccw(c153.977,118.773) v1@153.66,118.456
  Bottom Layer w0.3: v1(153.554,118.35) 235.774,118.35 239.787,114.337 290.028,114.337 297.724,106.641 297.724,78.548 292.975,73.798 286.701,73.798 285.405,72.503 269.485,72.503 J3.8@265.952,68.97 ; v1@153.66,118.244 cw(c153.916,117.988) 153.916,118.35 cw(c153.916,118.712) v1@153.66,118.456 ; J3.8@265.952,69.52 ccw(c265.952,70.848) 266.891,69.909 ccw(c267.83,68.97) J3.8@266.502,68.97 ; J3.8@265.952,69.82 ccw(c265.952,71.872) 267.403,70.421 ccw(c268.854,68.97) J3.8@266.802,68.97
LCD_D7: J3.10 MONITOR.14 | length 213.7
  Top Layer w0.3: MONITOR.14@151.02,161.65 cw(c151.02,159.598) 152.471,161.049 cw(c153.922,162.5) MONITOR.14@151.87,162.5 ; MONITOR.14@151.02,161.95 cw(c151.02,160.622) 151.959,161.561 ; MONITOR.14@151.02,162.5 152.614,160.906 v1(152.614,155.84) ; MONITOR.14@151.57,162.5 ccw(c152.898,162.5) 151.959,161.561 ; v1@152.508,155.946 ccw(c152.252,156.203) 152.614,156.203 ccw(c152.976,156.203) v1@152.72,155.946 ; v1@258.593,135.767 cw(c258.593,135.405) 258.849,135.661 cw(c259.105,135.917) v1@258.743,135.917 ; v1(258.593,135.917) 277.074,117.436 277.074,103.11 275.414,101.45 273.55,101.45 268.492,96.392 J3.10@268.492,68.97 ; J3.10@267.891,69.571 ccw(c266.44,71.022) 268.492,71.022 ccw(c270.544,71.022) J3.10@269.093,69.571 ; J3.10@268.103,69.359 ccw(c267.164,70.298) 268.492,70.298 ccw(c269.82,70.298) J3.10@268.881,69.359
  Bottom Layer w0.3: v1@152.614,155.69 cw(c152.614,155.328) 152.87,155.584 cw(c153.126,155.84) v1@152.764,155.84 ; v1(152.614,155.84) 172.537,135.917 v1(258.593,135.917) ; v1@258.487,135.811 ccw(c258.23,135.555) 258.23,135.917 ccw(c258.23,136.279) v1@258.487,136.023
LCD_EN: J3.2 MONITOR.6 | length 222.9
  Top Layer w0.3: MONITOR.6@130.099,161.899 cw(c128.648,160.448) 130.7,160.448 cw(c132.752,160.448) MONITOR.6@131.301,161.899 ; MONITOR.6@130.311,162.111 cw(c129.372,161.172) 130.7,161.172 cw(c132.028,161.172) MONITOR.6@131.089,162.111 ; v1@130.588,120.767 ccw(c130.317,121.038) 130.7,121.038 ; v1(130.694,120.661) 130.7,120.667 MONITOR.6@130.7,162.5 ; 130.7,121.009 ccw(c131.042,121.009) v1@130.8,120.767 ; v1@257.161,102.63 cw(c257.161,102.268) 257.417,102.524 cw(c257.673,102.78) v1@257.311,102.78 ; v1(257.161,102.78) 258.332,101.608 J3.2@258.332,68.97 ; J3.2@257.731,69.571 ccw(c256.28,71.022) 258.332,71.022 ccw(c260.384,71.022) J3.2@258.933,69.571 ; J3.2@257.943,69.359 ccw(c257.004,70.298) 258.332,70.298 ccw(c259.66,70.298) J3.2@258.721,69.359
  Bottom Layer w0.3: v1@130.694,120.511 cw(c130.694,120.149) 130.95,120.405 cw(c131.206,120.661) v1@130.844,120.661 ; v1(130.694,120.661) 142.988,108.368 160.412,108.368 164.146,104.634 192.114,104.634 192.648,104.1 193.438,104.1 193.617,103.92 194.734,103.92 195.875,102.78 v1(257.161,102.78) ; v1@257.055,102.674 ccw(c256.798,102.418) 256.798,102.78 ccw(c256.798,103.142) v1@257.055,102.886
LCD_RS: J2.16 MONITOR.4 | length 243.6
  Top Layer w0.3: MONITOR.4@125.019,161.899 cw(c123.568,160.448) 125.62,160.448 cw(c127.672,160.448) MONITOR.4@126.221,161.899 ; MONITOR.4@125.231,162.111 cw(c124.292,161.172) 125.62,161.172 cw(c126.948,161.172) MONITOR.4@126.009,162.111 ; MONITOR.4@125.62,162.5 125.62,109.816 135.85,99.585 v1(135.85,59.549) ; v1@135.744,59.655 ccw(c135.488,59.911) 135.85,59.911 ccw(c136.212,59.911) v1@135.956,59.655
  Bottom Layer w0.3: v1(135.85,59.549) 222.82,59.549 226.274,63.003 253.272,63.003 255.718,65.449 255.718,67.031 255.408,67.341 255.408,67.83 J2.16@254.268,68.97 ; v1@135.956,59.443 cw(c136.212,59.187) 136.212,59.549 cw(c136.212,59.911) v1@135.956,59.655 ; J2.16@254.369,68.429 cw(c254.501,67.727) 255.006,68.232 cw(c255.511,68.737) J2.16@254.809,68.869 ; J2.16@254.424,68.135 cw(c254.627,67.05) 255.408,67.83 cw(c256.188,68.611) J2.16@255.103,68.814
MIDI_IN: IC1.4 J2.2 R11.1 | length 88
  Top Layer w0.3: J2.2@236.488,68.97 239.965,72.447 v1(239.965,82.485) ; J2.2@236.488,69.52 ccw(c236.488,70.848) 237.427,69.909 ccw(c238.366,68.97) J2.2@237.038,68.97 ; J2.2@236.488,69.82 ccw(c236.488,71.872) 237.939,70.421 ccw(c239.39,68.97) J2.2@237.338,68.97 ; v1@239.859,82.379 cw(c239.603,82.123) 239.965,82.123 cw(c240.327,82.123) v1@240.071,82.379 ; IC1.4@282.54,92.31 285,94.77 R11.1@285,95 ; IC1.4@282.54,92.86 ccw(c282.54,94.188) 283.479,93.249 ccw(c284.418,92.31) IC1.4@283.09,92.31 ; IC1.4@282.54,93.16 ccw(c282.54,95.212) 283.991,93.761 ccw(c285.442,92.31) IC1.4@283.39,92.31 ; 283.386,93.156 ccw(c281.543,95) R11.1@284.15,95 ; 283.898,93.668 ccw(c282.567,95) R11.1@284.45,95 ; 283.942,93.712 cw(c285,92.653) R11.1@285,94.15 ; 284.411,94.181 ccw(c283.591,95) R11.1@284.75,95
  Bottom Layer w0.3: v1(239.965,82.485) 272.715,82.485 IC1.4@282.54,92.31 ; v1@240.071,82.379 cw(c240.327,82.123) 240.327,82.485 cw(c240.327,82.847) v1@240.071,82.591 ; 281.601,91.371 ccw(c280.662,92.31) IC1.4@281.99,92.31 ; 281.601,91.371 cw(c282.54,90.432) IC1.4@282.54,91.76 ; IC1.4@281.69,92.31 cw(c279.638,92.31) 281.089,90.859 cw(c282.54,89.408) IC1.4@282.54,91.46
MIDI_OUT: J2.4 R9.2 | length 77.8
  Top Layer w0.3: J2.4@239.028,68.97 241.463,71.405 241.463,85.254 v1(242.276,86.067) ; J2.4@239.028,69.52 ccw(c239.028,70.848) 239.967,69.909 ccw(c240.906,68.97) J2.4@239.578,68.97 ; J2.4@239.028,69.82 ccw(c239.028,71.872) 240.479,70.421 ccw(c241.93,68.97) J2.4@239.878,68.97 ; v1@242.126,86.067 cw(c241.764,86.067) 242.02,85.811 cw(c242.276,85.554) v1@242.276,85.917
  Bottom Layer w0.3: v1(242.276,86.067) 263.485,86.067 274.814,97.395 276.439,97.395 277.074,98.03 277.074,102.926 R9.2@275,105 ; v1@242.382,85.961 cw(c242.638,85.704) 242.638,86.067 cw(c242.638,86.429) v1@242.382,86.173 ; R9.2@275,104.15 cw(c275,102.098) 276.451,103.549 cw(c277.902,105) R9.2@275.85,105 ; R9.2@275,104.45 cw(c275,103.122) 275.939,104.061 cw(c276.878,105) R9.2@275.55,105
MISO: "ARDUINO MICRO.16" "ARDUINO SHIELD.1\"" | length 210.2
  Top Layer w0.3: 41.78,74.03 cw(c41.78,71.978) 43.231,73.429 cw(c44.682,74.88) 42.63,74.88 ; 41.78,74.33 cw(c41.78,73.002) 42.719,73.941 cw(c43.658,74.88) 42.33,74.88 ; 41.78,74.88 44.579,72.081 48.103,72.081 v1(52.665,76.643) ; v1@52.515,76.643 cw(c52.153,76.643) 52.409,76.387 cw(c52.665,76.131) v1@52.665,76.493
  Bottom Layer w0.3: v1(52.665,76.643) 234.251,76.643 236.348,78.74 ; v1@52.771,76.537 cw(c53.027,76.281) 53.027,76.643 cw(c53.027,77.005) v1@52.771,76.749 ; 235.498,78.74 cw(c233.446,78.74) 234.897,77.289 cw(c236.348,75.838) 236.348,77.89 ; 235.798,78.74 cw(c234.47,78.74) 235.409,77.801 cw(c236.348,76.862) 236.348,78.19
MOSI: "ARDUINO MICRO.18" "ARDUINO SHIELD.4\"" | length 215.4
  Top Layer w0.3: v1@183.268,78.197 ccw(c183.011,78.453) 183.374,78.453 ccw(c183.736,78.453) v1@183.48,78.197 ; v1@183.268,89.364 cw(c183.011,89.108) 183.374,89.108 cw(c183.736,89.108) v1@183.48,89.364 ; v1(183.374,78.091) v1(183.374,89.47)
  Bottom Layer w0.3: 44.32,90.12 69.821,90.12 70.471,89.47 v1(183.374,89.47) ; 44.709,89.731 cw(c45.648,88.792) 45.648,90.12 cw(c45.648,91.448) 44.709,90.509 ; 44.921,89.519 cw(c46.372,88.068) 46.372,90.12 cw(c46.372,92.172) 44.921,90.721 ; v1@183.268,89.364 ccw(c183.011,89.108) 183.011,89.47 ccw(c183.011,89.832) v1@183.268,89.576 ; v1(183.374,78.091) 230.619,78.091 233.808,81.28 ; v1@183.48,77.985 cw(c183.736,77.729) 183.736,78.091 cw(c183.736,78.453) v1@183.48,78.197 ; 232.958,81.28 cw(c230.906,81.28) 232.357,79.829 cw(c233.808,78.378) 233.808,80.43 ; 233.258,81.28 cw(c231.93,81.28) 232.869,80.341 cw(c233.808,79.402) 233.808,80.73
MUX1_X: J1.11 MUX1.3 | length 192.2
  Bottom Layer w0.3: MUX1.3@71.19,97.84 cw(c71.19,95.788) 72.641,97.239 cw(c74.092,98.69) MUX1.3@72.04,98.69 ; MUX1.3@71.19,98.14 cw(c71.19,96.812) 72.129,97.751 cw(c73.068,98.69) MUX1.3@71.74,98.69 ; MUX1.3@71.19,98.69 75.838,94.042 231.136,94.042 232.191,92.987 232.905,92.987 233.298,93.38 246.538,93.38 J1.11@249.188,96.03 ; J1.11@248.338,96.03 cw(c246.286,96.03) 247.737,94.579 cw(c249.188,93.128) J1.11@249.188,95.18 ; J1.11@248.638,96.03 cw(c247.31,96.03) 248.249,95.091 cw(c249.188,94.152) J1.11@249.188,95.48
MUX2_X: J1.9 MUX2.3 | length 113.9
  Bottom Layer w0.3: MUX2.3@146.19,97.84 cw(c146.19,95.788) 147.641,97.239 cw(c149.092,98.69) MUX2.3@147.04,98.69 ; MUX2.3@146.19,98.14 cw(c146.19,96.812) 147.129,97.751 cw(c148.068,98.69) MUX2.3@146.74,98.69 ; MUX2.3@146.19,98.69 147.739,97.141 189.209,97.141 189.55,96.8 231.618,96.8 234.438,93.98 238.303,93.98 238.903,94.58 245.198,94.58 ; J1.9@245.798,96.03 cw(c243.75,96.028) 245.198,94.58 ; J1.9@246.098,96.03 cw(c244.773,96.029) 245.71,95.092 cw(c246.647,94.155) J1.9@246.648,95.48 ; J1.9@246.648,95.18 ccw(c246.646,93.132) 245.198,94.58 ; J1.9@246.648,96.03 245.198,94.58
MUX3_X: J1.7 MUX4.3 | length 177.6
  Top Layer w0.3: v1@134.754,60.265 ccw(c134.497,60.521) 134.86,60.521 ccw(c135.222,60.521) v1@134.966,60.265 ; v1@134.754,80.042 cw(c134.497,79.786) 134.86,79.786 cw(c135.222,79.786) v1@134.966,80.042 ; v1(134.86,60.159) v1(134.86,80.148) ; v1(235.596,87.362) 235.596,87.518 J1.7@244.108,96.03 ; v1@235.746,87.362 cw(c236.485,87.362) 235.962,87.884 ; J1.7@243.258,96.03 cw(c241.206,96.03) 242.657,94.579 cw(c244.108,93.128) J1.7@244.108,95.18 ; J1.7@243.558,96.03 cw(c242.23,96.03) 243.169,95.091 cw(c244.108,94.152) J1.7@244.108,95.48
  Bottom Layer w0.3: MUX4.3@108.69,60.34 cw(c108.69,58.288) 110.141,59.739 cw(c111.592,61.19) MUX4.3@109.54,61.19 ; MUX4.3@108.69,60.64 cw(c108.69,59.312) 109.629,60.251 cw(c110.568,61.19) MUX4.3@109.24,61.19 ; MUX4.3@108.69,61.19 110.153,59.727 134.428,59.727 v1(134.86,60.159) ; v1@134.71,60.159 cw(c134.347,60.159) 134.604,59.903 cw(c134.86,59.646) v1@134.86,60.009 ; v1(134.86,80.148) 191.146,80.148 192.619,81.622 225.752,81.622 229.881,85.751 235.165,85.751 235.596,86.182 v1(235.596,87.362) ; v1@134.966,80.042 cw(c135.222,79.786) 135.222,80.148 cw(c135.222,80.511) v1@134.966,80.254 ; v1@235.49,87.256 cw(c235.234,87) 235.596,87 cw(c235.958,87) v1@235.702,87.256
MUX4_X: J1.5 MUX5.3 | length 137.1
  Top Layer w0.3: MUX5.3@146.19,61.19 150.62,65.62 158.41,65.62 160.34,67.55 160.34,70.268 158.126,72.482 v1(158.126,83.984) ; MUX5.3@146.19,61.74 ccw(c146.19,63.068) 147.129,62.129 ccw(c148.068,61.19) MUX5.3@146.74,61.19 ; MUX5.3@146.19,62.04 ccw(c146.19,64.092) 147.641,62.641 ccw(c149.092,61.19) MUX5.3@147.04,61.19 ; v1@158.02,83.878 cw(c157.764,83.622) 158.126,83.622 cw(c158.488,83.622) v1@158.232,83.878 ; v1@234.322,86.96 ccw(c234.065,87.216) 234.428,87.216 ccw(c234.79,87.216) v1@234.534,86.96 ; v1(234.428,86.854) 234.428,87.337 235.825,88.734 235.825,90.287 J1.5@241.568,96.03 ; J1.5@240.718,96.03 cw(c238.666,96.03) 240.117,94.579 cw(c241.568,93.128) J1.5@241.568,95.18 ; J1.5@241.018,96.03 cw(c239.69,96.03) 240.629,95.091 cw(c241.568,94.152) J1.5@241.568,95.48
  Bottom Layer w0.3: v1(158.126,83.984) 158.165,84.023 187.971,84.023 188.498,84.55 191.291,84.55 192.035,83.806 224.547,83.806 227.112,86.371 233.945,86.371 v1(234.428,86.854) ; v1@158.232,83.878 cw(c158.582,83.528) 158.582,84.023 ; v1@234.278,86.854 cw(c233.915,86.854) 234.172,86.598 cw(c234.428,86.342) v1@234.428,86.704
MUX5_X: J1.3 MUX6.3 | length 161.4
  Top Layer w0.3: v1@175.825,98.686 cw(c175.569,98.43) 175.931,98.43 cw(c176.294,98.43) v1@176.037,98.686 ; v1(175.931,98.792) 175.931,46.519 177.75,44.7 177.75,41.845 177.582,41.678 177.582,38.391 180.884,38.391 184.771,42.277 184.771,60.109 ; MUX6.3@183.69,61.19 184.771,60.109 ; MUX6.3@183.884,60.362 cw(c184.1,59.439) 184.771,60.109 ; MUX6.3@184.518,60.996 ccw(c185.441,60.78) 184.771,60.109
  Bottom Layer w0.3: v1(175.931,98.792) 183.892,98.792 186.61,101.51 188.86,101.51 190.135,100.235 190.135,98.03 190.765,97.4 232.217,97.4 235.037,94.58 237.578,94.58 J1.3@239.028,96.03 ; v1@176.037,98.686 cw(c176.294,98.43) 176.294,98.792 cw(c176.294,99.154) v1@176.037,98.898
MUX6_X: J1.1 MUX3.3 | length 195.6
  Top Layer w0.3: MUX3.3@71.19,61.19 74.985,64.985 89.47,64.985 v1(116.165,91.68) ; MUX3.3@71.19,61.74 ccw(c71.19,63.068) 72.129,62.129 ccw(c73.068,61.19) MUX3.3@71.74,61.19 ; MUX3.3@71.19,62.04 ccw(c71.19,64.092) 72.641,62.641 ccw(c74.092,61.19) MUX3.3@72.04,61.19 ; v1@116.015,91.68 cw(c115.653,91.68) 115.909,91.424 cw(c116.165,91.168) v1@116.165,91.53 ; J1.1@235.887,95.429 cw(c234.436,93.978) 236.488,93.978 cw(c238.54,93.978) J1.1@237.089,95.429 ; v1(235.901,91.68) 236.488,92.267 J1.1@236.488,96.03 ; v1@235.901,91.83 ccw(c235.901,92.192) 236.157,91.936 ccw(c236.413,91.68) v1@236.051,91.68 ; J1.1@236.099,95.641 cw(c235.16,94.702) 236.488,94.702 cw(c237.816,94.702) J1.1@236.877,95.641
  Bottom Layer w0.3: v1(116.165,91.68) 148.432,91.68 148.945,91.167 149.932,91.167 150.445,91.68 217.63,91.68 217.807,91.503 235.724,91.503 v1(235.901,91.68) ; v1@116.271,91.574 cw(c116.527,91.318) 116.527,91.68 cw(c116.527,92.042) v1@116.271,91.786 ; 235.111,91.503 ccw(c235.111,92.47) v1@235.795,91.786
MUX_SA: J2.10 MUX1.11 MUX2.11 MUX3.11 MUX4.11 MUX5.11 MUX6.11 | length 406
  Top Layer w0.3: MUX3.11@78.209,69.411 ccw(c76.758,70.862) 78.81,70.862 ccw(c80.862,70.862) MUX3.11@79.411,69.411 ; MUX1.11@78.209,105.709 cw(c76.758,104.258) 78.81,104.258 cw(c80.862,104.258) MUX1.11@79.411,105.709 ; MUX3.11@78.421,69.199 ccw(c77.482,70.138) 78.81,70.138 ccw(c80.138,70.138) MUX3.11@79.199,69.199 ; MUX1.11@78.421,105.921 cw(c77.482,104.982) 78.81,104.982 cw(c80.138,104.982) MUX1.11@79.199,105.921 ; MUX3.11@78.81,67.96 cw(c78.81,65.908) 80.261,67.359 cw(c81.712,68.81) MUX3.11@79.66,68.81 ; MUX3.11@78.81,68.26 cw(c78.81,66.932) 79.749,67.871 cw(c80.688,68.81) MUX3.11@79.36,68.81 ; MUX1.11@78.81,106.31 78.81,101.832 80.478,100.164 84.467,100.164 85.34,99.291 85.34,98.089 78.81,91.559 MUX3.11@78.81,68.81 80.273,67.347 84.72,67.347 v1(86.904,69.531) ; v1@86.754,69.531 cw(c86.392,69.531) 86.648,69.275 cw(c86.904,69.019) v1@86.904,69.381 ; MUX4.11@116.31,67.96 cw(c116.31,65.908) 117.761,67.359 cw(c119.212,68.81) MUX4.11@117.16,68.81 ; MUX4.11@116.31,68.26 cw(c116.31,66.932) 117.249,67.871 cw(c118.188,68.81) MUX4.11@116.86,68.81 ; MUX4.11@116.31,68.81 118.84,66.28 121.38,66.28 v1(125.774,70.674) ; v1@125.624,70.674 cw(c125.262,70.674) 125.518,70.418 cw(c125.774,70.162) v1@125.774,70.524 ; MUX2.11@153.81,106.31 163.234,115.734 179.995,115.734 180.427,115.302 180.427,79.693 MUX6.11@191.31,68.81 ; MUX2.11@153.81,106.86 ccw(c153.81,108.188) 154.749,107.249 ccw(c155.688,106.31) MUX2.11@154.36,106.31 ; MUX2.11@153.81,107.16 ccw(c153.81,109.212) 155.261,107.761 ccw(c156.712,106.31) MUX2.11@154.66,106.31 ; MUX6.11@190.46,68.81 ccw(c188.408,68.81) 189.859,70.261 ccw(c191.31,71.712) MUX6.11@191.31,69.66 ; MUX6.11@190.76,68.81 ccw(c189.432,68.81) 190.371,69.749 ccw(c191.31,70.688) MUX6.11@191.31,69.36
  Bottom Layer w0.3: MUX1.11@78.81,105.46 cw(c78.81,103.408) 80.261,104.859 cw(c81.712,106.31) MUX1.11@79.66,106.31 ; MUX1.11@78.81,105.76 cw(c78.81,104.432) 79.749,105.371 cw(c80.688,106.31) MUX1.11@79.36,106.31 ; MUX1.11@78.81,106.31 80.521,104.599 135.714,104.599 138.875,107.76 152.36,107.76 ; v1(86.904,69.531) 101.57,69.531 102.434,70.395 114.725,70.395 MUX4.11@116.31,68.81 ; v1@87.01,69.425 cw(c87.267,69.169) 87.267,69.531 cw(c87.267,69.893) v1@87.01,69.637 ; MUX4.11@115.46,68.81 ccw(c113.408,68.81) 114.859,70.261 ccw(c116.31,71.712) MUX4.11@116.31,69.66 ; MUX4.11@115.76,68.81 ccw(c114.432,68.81) 115.371,69.749 ccw(c116.31,70.688) MUX4.11@116.31,69.36 ; v1(125.774,70.674) 151.946,70.674 MUX5.11@153.81,68.81 ; v1@125.88,70.568 cw(c126.136,70.312) 126.136,70.674 cw(c126.136,71.036) v1@125.88,70.78 ; MUX5.11@152.96,68.81 ccw(c150.908,68.81) 152.359,70.261 ccw(c153.81,71.712) MUX5.11@153.81,69.66 ; MUX2.11@152.96,106.31 ccw(c150.912,106.312) 152.36,107.76 ; MUX5.11@153.26,68.81 ccw(c151.932,68.81) 152.871,69.749 ccw(c153.81,70.688) MUX5.11@153.81,69.36 ; MUX2.11@153.26,106.31 ccw(c151.935,106.311) 152.872,107.248 ccw(c153.809,108.185) MUX2.11@153.81,106.86 ; MUX2.11@153.81,107.16 cw(c153.808,109.208) 152.36,107.76 ; MUX2.11@153.81,106.31 152.36,107.76 ; MUX6.11@191.31,68.81 192.768,70.268 233.84,70.268 235.192,71.62 241.172,71.62 241.672,71.119 245.764,71.119 246.648,70.235 ; MUX6.11@191.31,69.36 ccw(c191.31,70.688) 192.249,69.749 ccw(c193.188,68.81) MUX6.11@191.86,68.81 ; MUX6.11@191.31,69.66 ccw(c191.31,71.712) 192.761,70.261 ccw(c194.212,68.81) MUX6.11@192.16,68.81 ; J2.10@246.327,69.757 ccw(c246.132,70.235) 246.648,70.235 ; J2.10@246.648,68.97 246.648,70.235 ; J2.10@246.969,69.757 cw(c247.164,70.235) 246.648,70.235
MUX_SB: J2.12 MUX1.10 MUX2.10 MUX3.10 MUX4.10 MUX5.10 MUX6.10 | length 338.4
  Top Layer w0.3: MUX3.10@80.749,69.411 ccw(c79.298,70.862) 81.35,70.862 ccw(c83.402,70.862) MUX3.10@81.951,69.411 ; MUX3.10@80.961,69.199 ccw(c80.022,70.138) 81.35,70.138 ccw(c82.678,70.138) MUX3.10@81.739,69.199 ; MUX3.10@81.35,68.81 81.35,92.805 85.94,97.395 85.94,101.72 MUX1.10@81.35,106.31 ; MUX1.10@81.35,105.46 cw(c81.35,103.408) 82.801,104.859 cw(c84.252,106.31) MUX1.10@82.2,106.31 ; MUX1.10@81.35,105.76 cw(c81.35,104.432) 82.289,105.371 cw(c83.228,106.31) MUX1.10@81.9,106.31 ; MUX5.10@155.5,68.81 ccw(c153.448,68.81) 154.899,70.261 ccw(c156.35,71.712) MUX5.10@156.35,69.66 ; MUX2.10@155.5,106.31 cw(c153.448,106.31) 154.899,104.859 cw(c156.35,103.408) MUX2.10@156.35,105.46 ; MUX5.10@155.8,68.81 ccw(c154.472,68.81) 155.411,69.749 ccw(c156.35,70.688) MUX5.10@156.35,69.36 ; MUX2.10@155.8,106.31 cw(c154.472,106.31) 155.411,105.371 cw(c156.35,104.432) MUX2.10@156.35,105.76 ; MUX5.10@156.35,68.81 139.66,85.5 139.66,99.808 144.638,104.786 154.826,104.786 MUX2.10@156.35,106.31 ; v1(245.146,70.369) 245.197,70.42 247.738,70.42 J2.12@249.188,68.97 ; v1@245.252,70.263 cw(c245.631,69.885) 245.631,70.42 ; J2.12@248.338,68.97 ccw(c246.289,68.971) 247.738,70.42 ccw(c249.187,71.869) J2.12@249.188,69.82 ; J2.12@248.638,68.97 ccw(c247.312,68.971) 248.25,69.908 ccw(c249.187,70.846) J2.12@249.188,69.52
  Bottom Layer w0.3: MUX3.10@81.35,67.96 cw(c81.35,65.908) 82.801,67.359 cw(c84.252,68.81) MUX3.10@82.2,68.81 ; MUX3.10@81.35,68.26 cw(c81.35,66.932) 82.289,67.871 cw(c83.228,68.81) MUX3.10@81.9,68.81 ; MUX3.10@81.35,68.81 82.813,67.347 117.387,67.347 MUX4.10@118.85,68.81 120.313,67.347 140.96,67.347 141.847,66.46 143.057,66.46 143.357,66.76 147.653,66.76 148.24,67.347 154.887,67.347 MUX5.10@156.35,68.81 157.813,67.347 192.387,67.347 MUX6.10@193.85,68.81 195.313,67.347 217.74,67.347 219.823,69.43 233.858,69.43 235.449,71.02 240.574,71.02 241.174,70.42 245.096,70.42 v1(245.146,70.369) ; MUX4.10@118,68.81 cw(c115.948,68.81) 117.399,67.359 cw(c118.85,65.908) 118.85,67.96 cw(c118.85,65.908) 120.301,67.359 cw(c121.752,68.81) MUX4.10@119.7,68.81 ; MUX4.10@118.3,68.81 cw(c116.972,68.81) 117.911,67.871 cw(c118.85,66.932) 118.85,68.26 cw(c118.85,66.932) 119.789,67.871 cw(c120.728,68.81) MUX4.10@119.4,68.81 ; MUX5.10@155.5,68.81 cw(c153.448,68.81) 154.899,67.359 cw(c156.35,65.908) 156.35,67.96 cw(c156.35,65.908) 157.801,67.359 cw(c159.252,68.81) MUX5.10@157.2,68.81 ; MUX5.10@155.8,68.81 cw(c154.472,68.81) 155.411,67.871 cw(c156.35,66.932) 156.35,68.26 cw(c156.35,66.932) 157.289,67.871 cw(c158.228,68.81) MUX5.10@156.9,68.81 ; MUX6.10@193,68.81 cw(c190.948,68.81) 192.399,67.359 cw(c193.85,65.908) 193.85,67.96 cw(c193.85,65.908) 195.301,67.359 cw(c196.752,68.81) MUX6.10@194.7,68.81 ; MUX6.10@193.3,68.81 cw(c191.972,68.81) 192.911,67.871 cw(c193.85,66.932) 193.85,68.26 cw(c193.85,66.932) 194.789,67.871 cw(c195.728,68.81) MUX6.10@194.4,68.81 ; 244.662,70.42 cw(c244.662,69.885) v1@245.04,70.263